# EAGLE board RC Kill Switch (EAGLE 5.11)
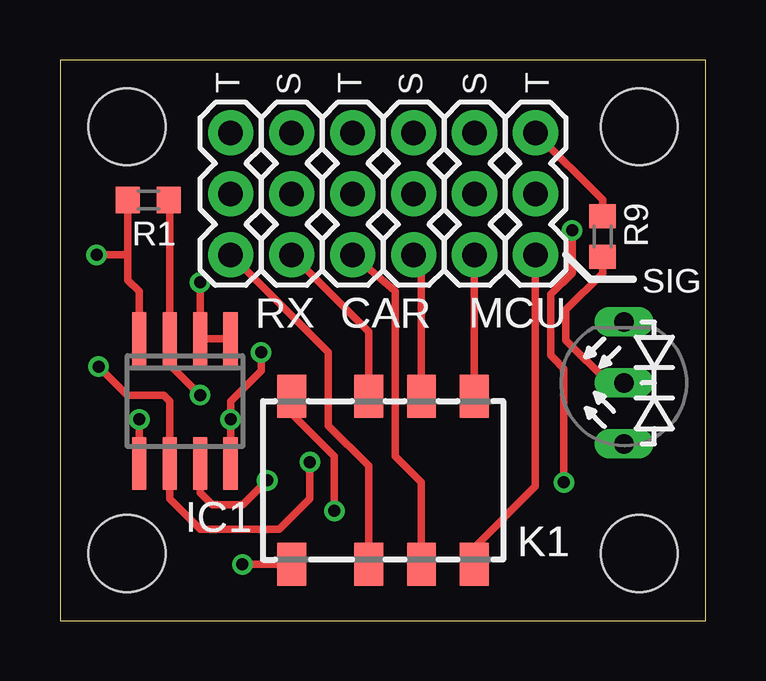
[diagram p0: board, top side]
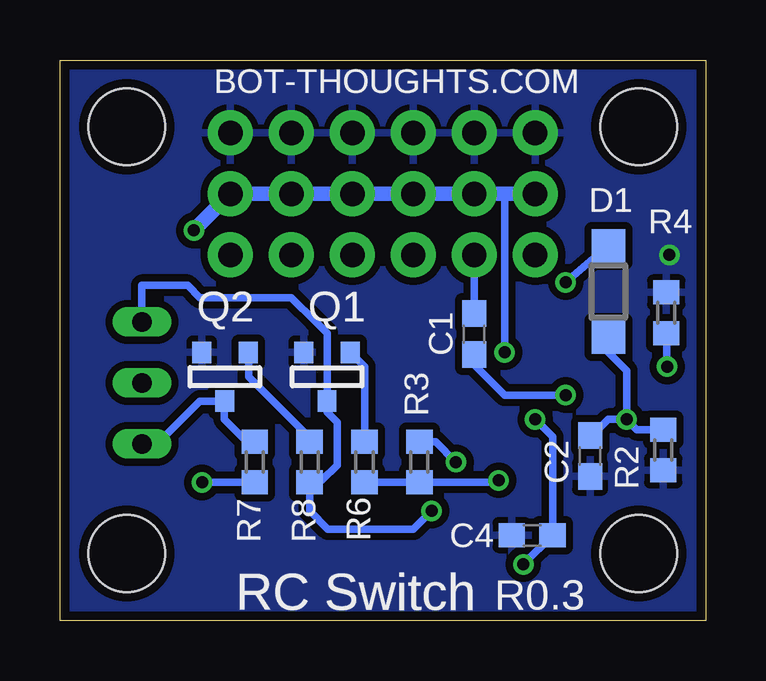
[diagram p1: board, bottom side, seen from below]

Size 26.91 x 23.36 mm. Coordinates in mm from the lower left corner, seen from the top.
Outline: 0,0 26.91,0 26.91,23.36 0,23.36 0,0
Copper layers (1*16): Top 0.0356mm / dielectric 1.5011mm / Bottom 0.0356mm
Design rules "LaenPCBOrder": minimum track width 6mil, minimum drill 13mil, track to track 6mil, track to pad 6mil, pad to pad 6mil, via to via 6mil, smd to smd 6mil, copper to edge 15mil, drill to drill 6mil, minimum pad ring 7mil, minimum via ring 7mil, stop-mask expansion 4mil, vias tented up to drill 0mil, thermal gap 10mil
Holes 3.2 mm at 2.79,2.79 24.13,2.79 24.13,20.57 2.79,20.57

## Footprints (pad centres in the part's own frame; a part is rotated, then mirrored left to right if it is on the bottom)
C0603 = smd 1.1 x 1: 1 -0.85,0; 2 0.85,0
SOD123 = smd 1.4 x 1.4: A 1.9,0; C -1.9,0
DUOLED = drill 0.813 long: A1 -3.81,0; A2 1.27,0; K -1.27,0
SO08 = smd 0.6 x 2.2: 1 -1.905,-2.6; 2 -0.635,-2.6; 3 0.635,-2.6; 4 1.905,-2.6; 5 1.905,2.6; 6 0.635,2.6; 7 -0.635,2.6; 8 -1.905,2.6
1X03 = drill 1.016 pad 1.88 round: 1 0,0; 2 2.54,0; 3 5.08,0
G6K-2F-Y = smd 1.2 x 1.8: 1 -3.8,-3.5; 2 -0.6,-3.5; 3 1.6,-3.5; 4 3.8,-3.5; 5 3.8,3.5; 6 1.6,3.5; 7 -0.6,3.5; 8 -3.8,3.5
SOT-23 = smd 0.787 x 0.889: 1 0.025,-1.016; 2 -0.94,1.016; 3 0.991,1.016
R0603 = smd 1 x 1.1: 1 -0.85,0; 2 0.85,0

## Placement (x,y rotation side)
C1  0.22uF  [C0603]  9.65,11.94 90 bottom
C2  4.7uF  [C0603]  4.83,6.86 270 bottom
C4  0.1uF  [C0603]  7.24,3.56 180 bottom
D1  1N4148  [SOD123]  4.06,13.72 90 bottom
D2  Indicator  [DUOLED]  23.5,11.18 90 top
IC1  LM258N  [SO08]  5.21,9.14 180 top
JP1  S  [1X03]  17.27,20.32 270 top
JP2  T  [1X03]  19.81,20.32 270 top
JP3  S  [1X03]  9.65,20.32 270 top
JP4  T  [1X03]  7.11,20.32 270 top
JP5  S  [1X03]  14.73,20.32 270 top
JP6  T  [1X03]  12.19,20.32 270 top
K1  G6K-2F-Y  [G6K-2F-Y]  13.46,5.84 0 top
Q1  2N2222A  [SOT-23]  15.81,10.16 0 bottom
Q2  2N2222A  [SOT-23]  20.07,10.16 0 bottom
R1  10k  [R0603]  3.68,17.53 0 top
R2  10k  [R0603]  1.78,7.11 90 bottom
R3  10k  [R0603]  11.94,6.6 90 bottom
R4  4.7k  [R0603]  1.65,12.83 90 bottom
R6  3.3k  [R0603]  14.22,6.6 270 bottom
R7  4.7k  [R0603]  18.8,6.6 270 bottom
R8  10k  [R0603]  16.51,6.6 270 bottom
R9  330  [R0603]  22.61,16 270 top

## Library data of the parts
C1 = rcl; PARTNO: 250R14W224KV4T
C2 = rcl; PARTNO: GRM188F51A475ZE20D
C4 = rcl; PARTNO: C0603C104K8RACTU
D1 = diode; PARTNO: 1N4148W-TP
D2 = special; PARTNO: 1193970
IC1 = linear; PARTNO: LM258DR
JP1-JP6 = SparkFun; BOM: EXCLUDE; PARTNO: 2211S-06G
K1 = relay; MF: OMRON COMPONENTS USA; MPN: G6K-2F-Y DC3; OC_FARNELL: 1690316; OC_NEWARK: 89C6451; PARTNO: G6K-2F-Y DC5
Q1 Q2 = mes; PARTNO: PMBT2222A,215
R1-R3 R8 = rcl; PARTNO: ERJ-3GEYJ103V
R4 R7 = rcl; PARTNO: RC0603JR-074K7L
R6 = rcl; PARTNO: RC0603JR-073K3L
R9 = rcl; PARTNO: ERJ-3GEYJ331V

## Nets
+5V: C4.1 IC1.8 JP1.2 JP2.2 JP3.2 JP4.2 JP5.2 JP6.2 K1.1 R7.2
ESC: JP6.3 K1.3
GND: C2.2 C4.2 IC1.4 JP1.1 JP2.1 JP3.1 JP4.1 JP5.1 JP6.1 Q1.2 Q2.2 R1.1 R2.1 R4.2 R9.1
MCU_EN: D2.A2 K1.8 Q1.1 R8.2
MCU_ESC: JP2.3 K1.4
MCU_STEER: JP1.3 K1.5
N$1: D1.A IC1.1 IC1.2
N$2: C2.1 D1.C IC1.5 R2.2
N$3: IC1.6 R3.2 R4.1
N$4: IC1.7 R3.1 R6.2
N$5: C1.1 IC1.3 R1.2
N$6: D2.K R9.2
N$7: Q2.3 R8.1
N$8: Q1.3 R6.1
RC_EN: D2.A1 Q2.1 R7.1
RX_ESC: JP4.3 K1.2
RX_STEER: C1.2 JP3.3 K1.7
SERVO: JP5.3 K1.6

## Tracks (layer width: path | path; a pad name or v marks a point on that pad's centre or on a via)
+5V  (via drill 0.5)
  Top 0.305: v20.99,5.75 20.99,10.5 20.57,10.92 20.45,11.05 20.45,13.59 21.34,14.48 21.34,15.24 v21.34,16.26 | IC1.8 v7.11,8.38 7.11,9.14 8.38,10.41 v8.38,11.18 | v7.6,2.34 K1.1
  Bottom 0.305: v20.99,5.75 R7.2 | v8.38,11.18 8.38,17.78 | v7.11,8.38 6.39,7.66 6.39,5.12 C4.1 v7.6,2.34
  Bottom 0.61: JP4.2 8.38,17.78 JP3.2 JP6.2 JP5.2 JP1.2 JP2.2 v21.34,16.26
ESC
  Top 0.305: K1.3 15.06,5.77 13.97,6.86 13.97,13.72 JP6.3
GND  (via drill 0.5)
  Top 0.305: 3.3,11.94 IC1.4 3.3,13.72 2.83,14.19 2.83,15.24 | R9.1 22.61,17.53 JP2.1 | 2.83,15.24 2.83,15.67 R1.1 | 2.83,15.24 v1.52,15.24
  pour Bottom (isolate 0.305, rank 2): 0,0 26.92,0 26.92,23.37 0,23.37
MCU_EN  (via drill 0.5)
  Top 0.305: K1.8 9.66,8.63 11.43,6.86 v11.43,4.57
  Bottom 0.305: 23.56,12.64 D2.A2 23.5,13.97 23.46,13.97 21.59,13.97 21.08,13.46 17.27,13.46 16.26,12.45 15.79,11.98 Q1.1 15.79,8.67 15.37,8.26 15.37,6.48 16,5.84 16.42,5.84 R8.2 16.51,4.57 15.75,3.81 12.19,3.81 v11.43,4.57
MCU_ESC
  Top 0.305: K1.4 17.26,3.04 19.81,5.59 JP2.3
MCU_STEER
  Top 0.305: K1.5 JP1.3
N$1  (via drill 0.5)
  Top 0.305: v5.84,14.09 IC1.2 IC1.1
  Bottom 0.305: v5.84,14.09 D1.A
N$2  (via drill 0.5)
  Top 0.305: IC1.5 v3.3,8.38
  Bottom 0.305: D1.C 4.06,11.18 3.3,10.41 v3.3,8.38 | C2.1 4.74,7.71 4.06,8.38 v3.3,8.38 | R2.2 2.88,7.96 v3.3,8.38
N$3  (via drill 0.5)
  Top 0.305: v1.61,10.58 2.79,9.4 4.32,9.4 4.57,9.14 IC1.6 4.57,5.08 5.84,3.81 8.13,3.81 9.14,3.81 10.41,5.08 v10.41,6.6
  Bottom 0.305: v1.61,10.58 R4.1 | R3.2 11.26,7.45 v10.41,6.6
N$4  (via drill 0.5)
  Top 0.305: IC1.7 5.84,5.33 6.35,4.83 7.62,4.83 v8.64,5.84
  Bottom 0.305: R6.2 R3.1 8.72,5.75 v8.64,5.84
N$5  (via drill 0.5)
  Top 0.305: v5.84,9.4 4.57,10.67 4.57,10.92 IC1.3 4.57,14.31 4.57,17.49 R1.2
  Bottom 0.305: C1.1 9.65,10.67 8.38,9.4 7.11,9.4 v5.84,9.4
N$6
  Top 0.305: D2.K 22.86,9.91 21.08,11.68 21.08,12.87 21.08,12.95 22.61,14.48 R9.2
N$7
  Bottom 0.305: R8.1 16.51,7.62 19.05,10.16 19.05,11.15 Q2.3
N$8
  Bottom 0.305: R6.1 14.22,10.58 Q1.3
RC_EN
  Bottom 0.305: D2.A1 22.86,7.37 21.08,9.14 Q2.1 20.07,9.12 20.07,8.38 19.14,7.45 R7.1
RX_ESC
  Top 0.305: K1.2 12.86,6.44 11.18,8.13 11.18,11.18 JP4.3
RX_STEER
  Top 0.305: K1.7 12.86,12.03 JP3.3
  Bottom 0.305: JP3.3 C1.2
SERVO
  Top 0.305: K1.6 15.06,14.91 JP5.3

## Text on the board
tPlace: RX | CAR | MCU
tNames: SIG
bNames: BOT-THOUGHTS.COM | R0.3 | RC Switch
_tsilk: T | S | T | S | S | T | R1 | R9 | SIG | RX | CAR | MCU | IC1 | K1
_bsilk: BOT-THOUGHTS.COM | D1 | R4 | Q1 | Q2 | C1 | R3 | C2 | R2 | R6 | R8 | R7 | C4 | R0.3 | RC Switch